# Altium PCB Version1.2.PcbDoc
Units mil, origin at the board's own origin, x right, y up, seen from the top; angles counter-clockwise.
Board outline 1800 x 2100 mil, 2 copper layers (Top Layer, Bottom Layer); 14 components, 19 nets, 44 pads, 0 vias.
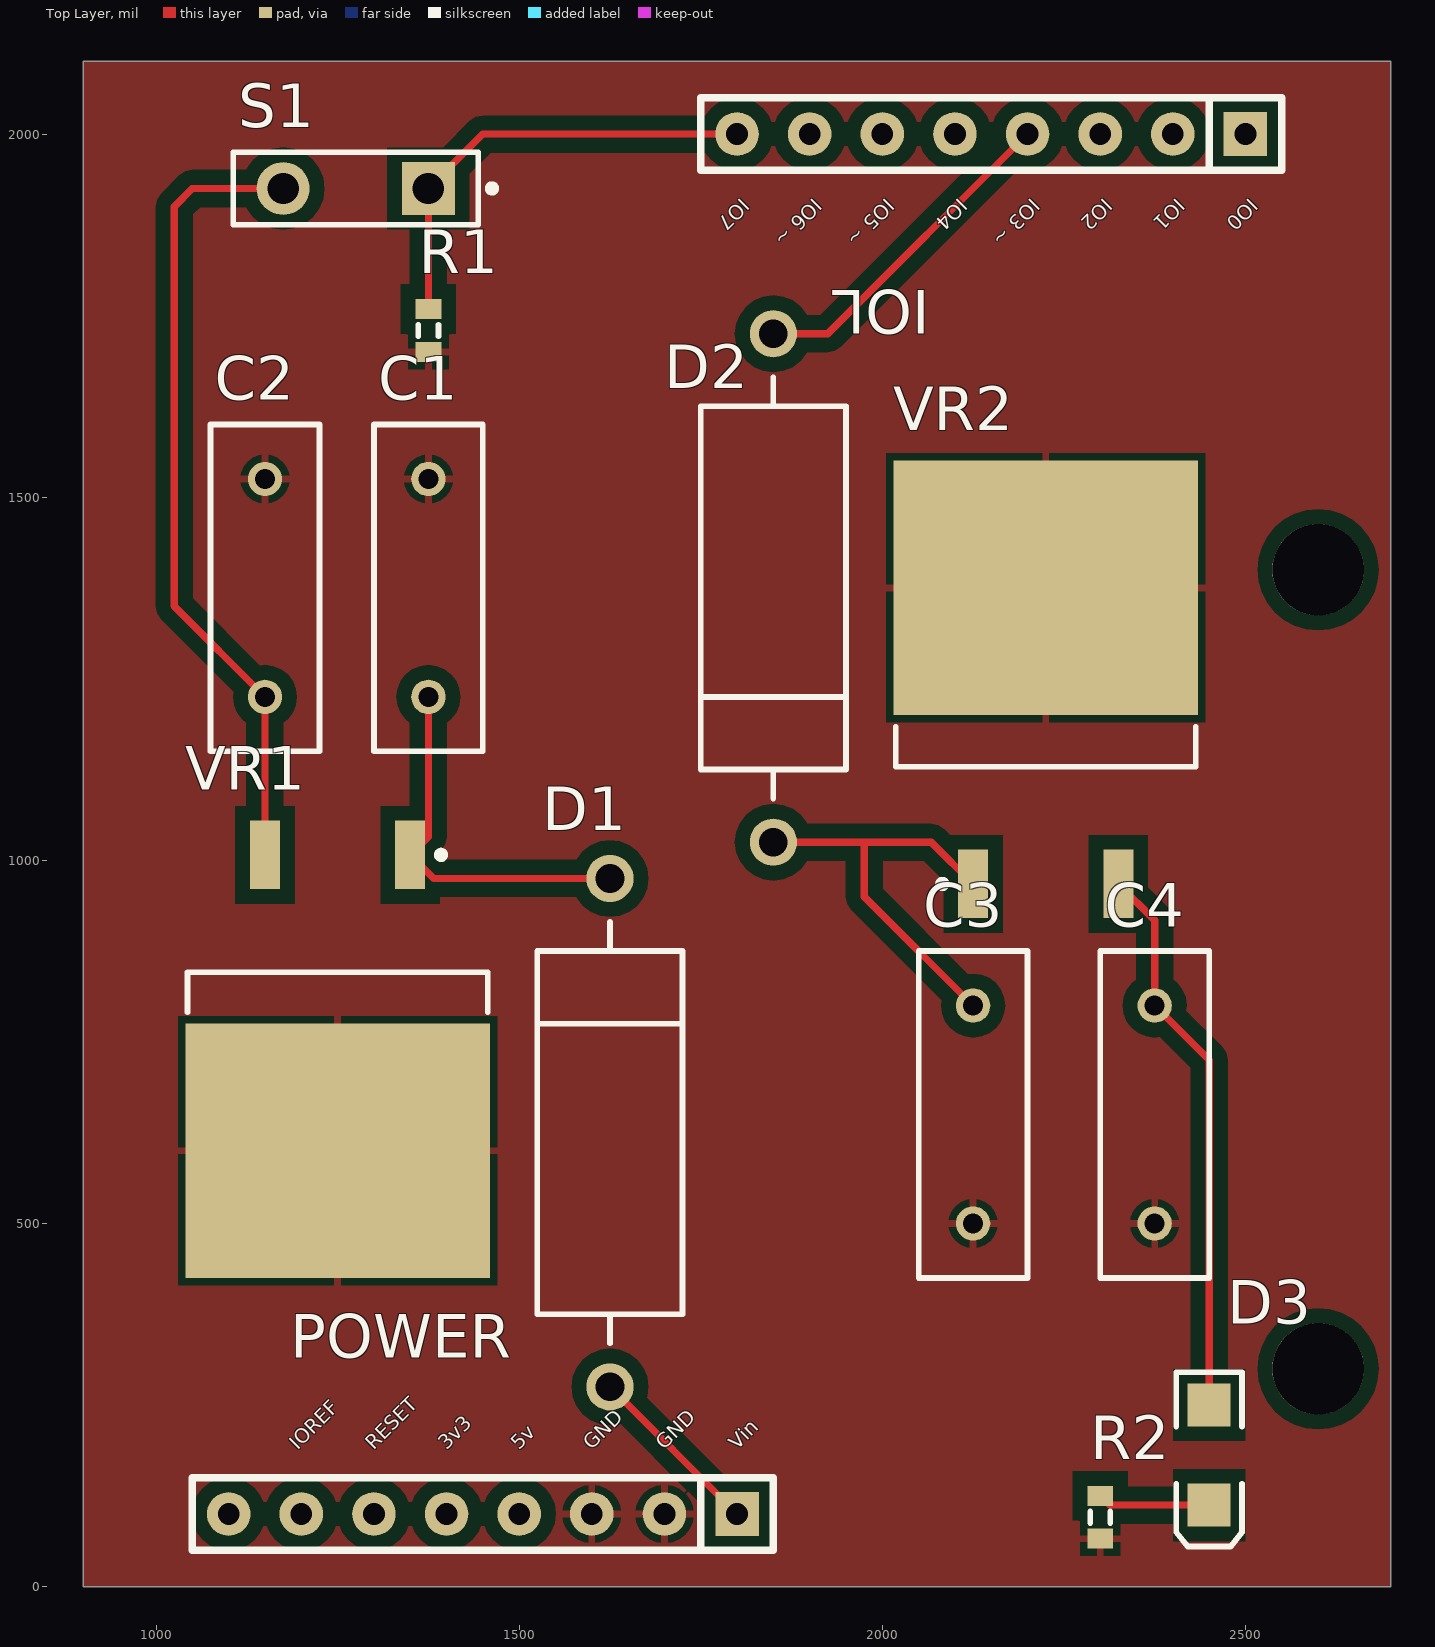
[diagram p0: Top Layer view]
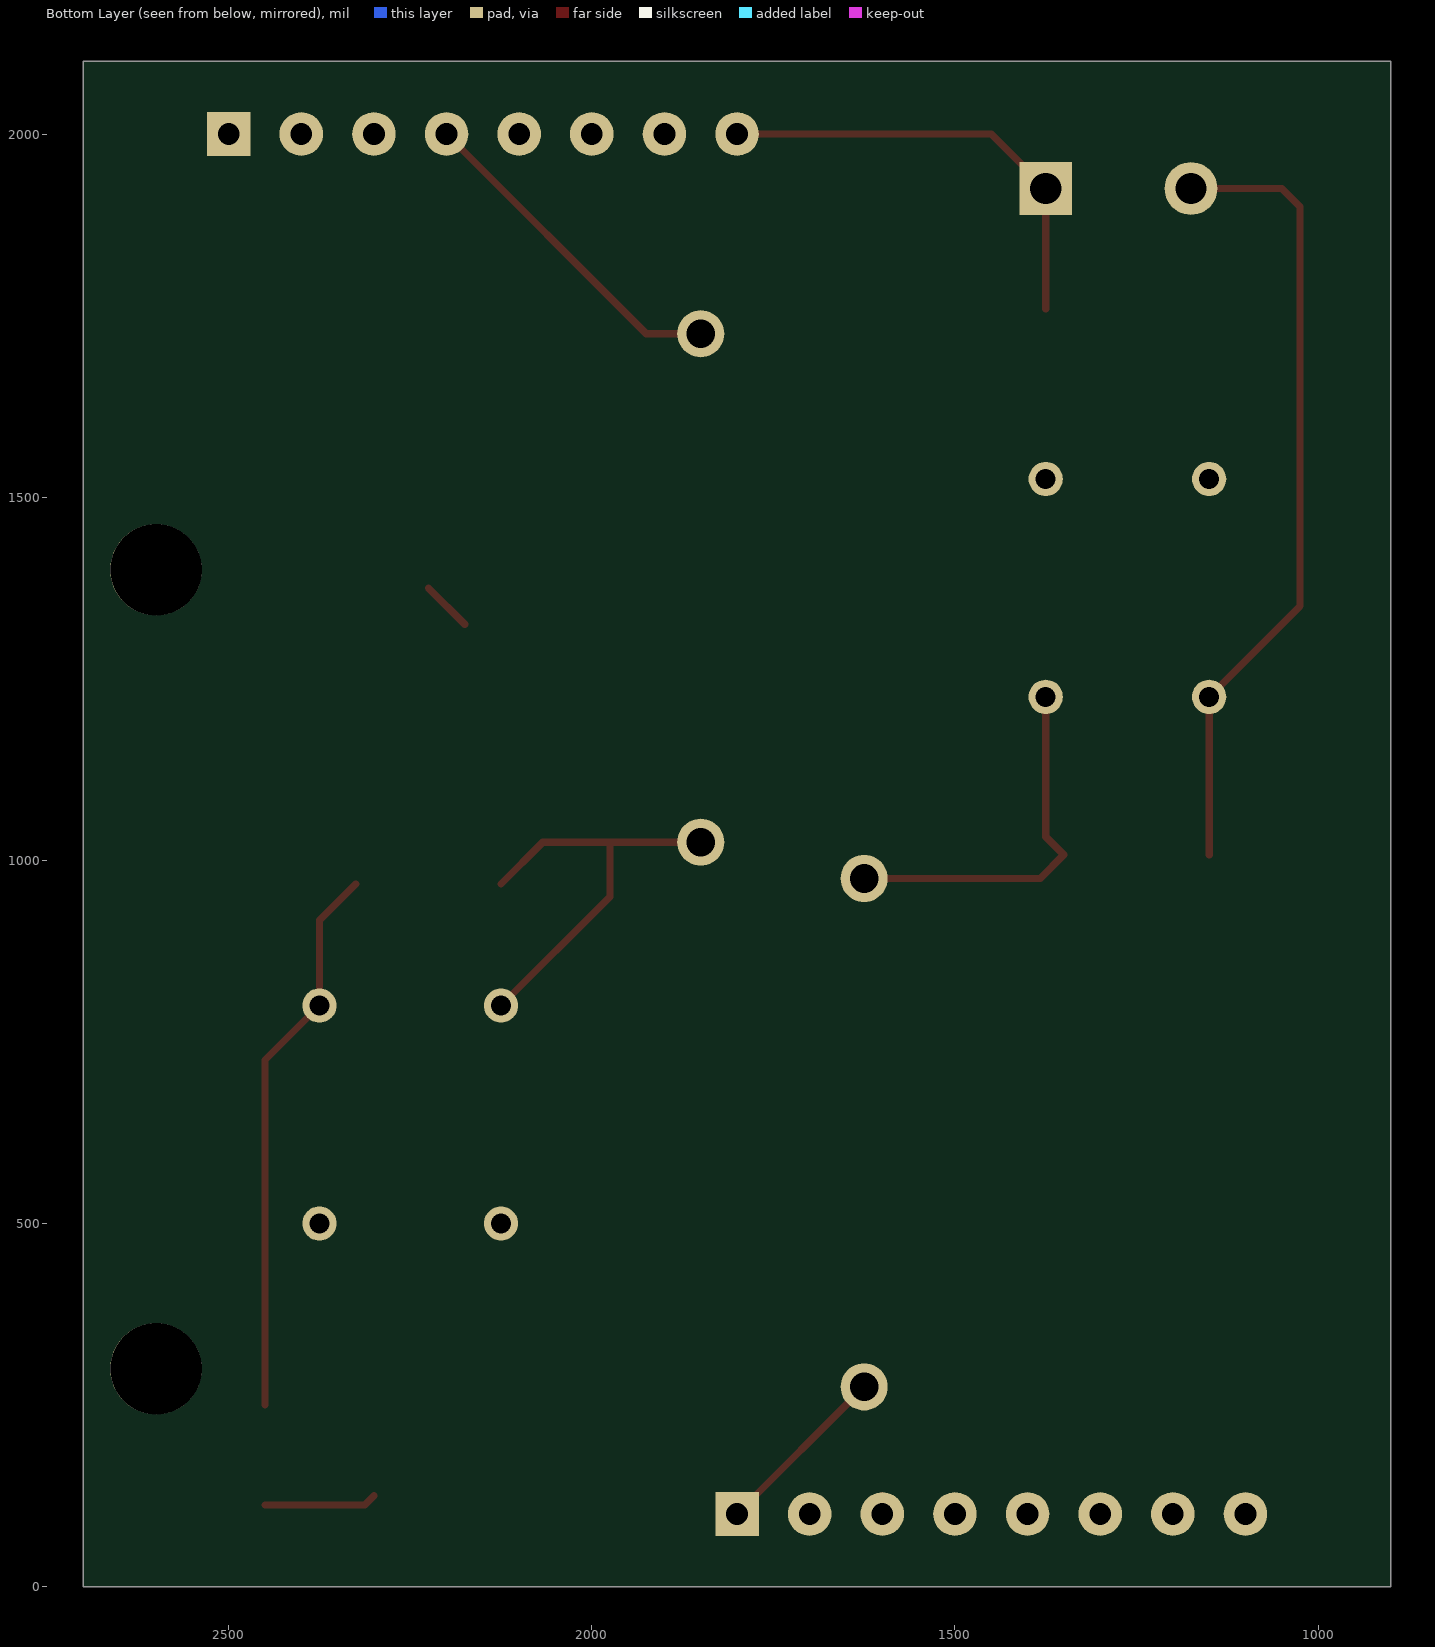
[diagram p1: Bottom Layer view, seen from below]

## Layer stack, top to bottom
Top Solder: solder mask 0.4, Solder Resist, Dk 3.5
Top Layer: signal copper 1.4
Dielectric1: dielectric 12.6, FR-4, Dk 4.8
Bottom Layer: signal copper 1.4
Bottom Solder: solder mask 0.4, Solder Resist, Dk 3.5

## Board outline
900,2100 2700,2100 2700,0 900,0

## Design rules (kind name [scope] priority, off if disabled: settings)
Clearance [All] p1: gap=20 ignorepadtopadclearanceinfootprint=FALSE
PolygonConnect [All] p1: connectstyle=Relief reliefconductorwidth=10 reliefentries=4 polygonreliefangle="90 Angle" airgapwidth=10
RoomDefinition "LED Light Schematic" [InComponentClass('LED Light Schematic')] p1: confinementstyle=ConfineOut formatcopy=TRUE lockcomponents=FALSE outline 2745,-35 3335,-35 3335,430 2745,430
RoutingVias [All] p1: holewidth=28 width=50 viastyle="Through Hole" minholewidth=28 minwidth=50 maxholewidth=28 maxwidth=50
SilkToSolderMaskClearance SilkscreenOverComponentPads [IsPad] p1: minsilkscreentomaskgap=10 clearancetoexposedcopper=TRUE
SolderMaskExpansion [All] p1: expansion=4
Width [All] p1: maxlimit=10 minlimit=10 preferedwidth=10
29 further rules are at their usual default settings.

## Components (designator, comment, footprint, x,y, rotation, side; value= is the part's Value field where it differs from the comment)
C1 "Cap" RAD-0.3 1375,1375 r270 top value=0.1uF
C2 "Cap" RAD-0.3 1150,1375 r270 top value=0.1uF
C3 "Cap" RAD-0.3 2125,650 r90 top value=0.1uF
C4 "Cap" RAD-0.3 2375,650 r90 top value=0.1uF
D1 "5V Zener" DIODE-0.7 1625,625 r90 top
D2 "3.3V Zener" DIODE-0.7 1850,1375 r270 top
D3 "Red LED" 3.2X1.6X1.1 2450,181.1 r270 top
IOL "IOL" "Header 8x1 8.5mm" 2500,2000 r180 top locked
POWER "POWER_UNO" "Header 8x1 8.5mm" 1800,100 r180 top locked
R1 "Res3" J1-0603 1375,1729.53 r90 top value=100k
R2 "Res3" J1-0603 2300,95.47 r90 top value=220
S1 "SW-PB" SPST-2 1275,1925 r180 top
VR1 "5V Reg." D2PAK_N 1250,739.76 r270 top
VR2 "3.3V Reg" D2PAK_N 2225,1235.24 r90 top

## Footprints (in the part's own frame and the unit in brackets; to place one, negate y for a bottom-side part, rotate by r counter-clockwise, add the part's x,y. Pads: shape width x height; smd on the part's side, far side on the other; paste and mask are expansions set on the pad)
3.2X1.6X1.1 [mm] "SMT LED; 2 Flat Leads"
  rect 1.5x1.5 smd: 1(-1.75,0) 2(1.75,0)
  silkscreen extent -2.9,-1.15 3.2,1.15
D2PAK_N [mm] "D2-PAK, 4-Leads, Body 8.8x10.4mm, Pitch 2.54mm, Lead Span 15.1mm, IPC Medium Density"
  rect 2.4x1.05 smd: 1(-6.8,2.54) 3(-6.8,-2.54)
  rect 8.9x10.65 smd: 2(3.55,0)
  silkscreen extent -6.92,-5.25 -1.3,5.25, body extent -2.7,-5.28 6.3,5.28, height 4.69
DIODE-0.7 [mm] "Diode, Thru-Hole; 2 Leads; 0.7 in Pin Spacing"
  round 1.65 hole 1: 1(-8.89,0) 2(8.89,0)
  silkscreen extent -7.37,-2.54 7.37,2.54
"Header 8x1 8.5mm" [mil] "Stackable 8 pin header"
  rect 60x60 hole 30: 1(0,0)
  round 60 hole 30: 2(100,0) 3(200,0) 4(300,0) 5(400,0) 6(500,0) 7(600,0) 8(700,0)
  silkscreen extent -50,-50 750,50, body extent -50,-50 750,50, height 335
J1-0603 [mm] "Chip Resistor, Body 1.6x0.8mm, IPC High Density"
  rect 0.7x0.9 smd: 1(-0.75,0) 2(0.75,0)
  silkscreen extent -0.2,-0.35 0.2,0.35, body extent -0.85,-0.48 0.85,0.48, height 0.9
RAD-0.3 [mm] "Radial Cap, Thru-Hole; 2 Leads; 0.3 in Pin Spacing"
  round 1.2 hole 0.7: 1(-3.81,0) 2(3.81,0)
  silkscreen extent -5.71,-1.91 5.71,1.91
SPST-2 [mm] "Switch; 2 Leads"
  rect 1.85x1.85 hole 1.1: 1(-2.54,0)
  round 1.85 hole 1.1: 2(2.54,0)
  silkscreen extent -4.89,-1.27 4.28,1.27

## Part data
C1 C2 C3 C4: "Capacitor", LatestRevisionDate=17-Jul-2002, LatestRevisionNote="Re-released for DXP Platform.", PackageDescription="Radial Cap, Thru-Hole; 2 Leads; 0.3 in Pin Spacing", PackageReference=RAD-0.3, Published=8-Jun-2000, Publisher="Altium Limited"
D1 D2: library part "D Zener", "Zener Diode", LatestRevisionDate=17-Jul-2002, LatestRevisionNote="Re-released for DXP Platform.", PackageDescription="Diode, Thru-Hole; 2 Leads; 0.7 in Pin Spacing", PackageReference=DIODE-0.7, Published=8-Jun-2000, Publisher="Altium Limited"
D3: library part LED2, "Typical RED, GREEN, YELLOW, AMBER GaAs LED", LatestRevisionDate=17-Jul-2002, LatestRevisionNote="Re-released for DXP Platform.", PackageDescription="SM LED; 2 Flat Leads", PackageReference=3.2X1.6X1.1, PackageVersion=Feb-2002, Published=8-Jun-2000, Publisher="Altium Limited"
IOL POWER: Supplier Part Number 1=SAM1198-08-ND, Supplier 1=Digi-Key, Supplier 2=Arrow, Supplier 3=Arrow, Supplier 4=Arrow, Supplier Part Number 2=2698939, Supplier Part Number 3=2698940, Supplier Part Number 4=2698925
R1 R2: "Resistor", LatestRevisionDate=29-May-2009, LatestRevisionNote="IPC-7351 Footprint Added.", PackageDescription="Chip Resistor", PackageReference=J1-0603, Published=8-Jun-2000, Publisher="Altium Limited"
S1: "Switch", LatestRevisionDate=17-Jul-2002, LatestRevisionNote="Re-released for DXP Platform.", PackageDescription="Switch; 2 Leads", PackageReference=SPST-2, Published=24-Mar-1999, Publisher="Altium Limited"
VR1 VR2: library part "Volt Reg", "Voltage Regulator", LatestRevisionDate=29-May-2009, LatestRevisionNote="IPC-7351 Footprint Added.", PackageDescription="3-Pin Transistor Outline Package 2.54 mm Pitch, 15.1 mm Lead Span", PackageReference=D2PAK, Published=24-Mar-1999, Publisher="Altium Limited"

## Free pads (board coordinates)
  round 125.98 hole 125.98: 0(2600,300) 0(2600,1400)

## Nets (pads, with @x,y where several pads share a name; then routed paths per layer and width w, separated by ;. In a path a pad name is that pad's centre, name@x,y a point inside that pad or via, vN(x,y) a via of type N, cw(c..) or ccw(c..) an arc to the next point about the centre after c; other vN are vias at no path point)
3V3: POWER.5
5V: POWER.4
GND: C1.1 C2.1 C3.1 C4.1 POWER.2 POWER.3 R1.1 R2.1 VR1.2 VR2.2 | length 95.7
  Top Layer w10: POWER.3 POWER.3@1600,125 ; VR2.2@2175,1325 VR2.2
IO0: IOL.1
IO1: IOL.2
IO2: IOL.3
IO3: D2.1 IOL.4 | length 463.9
  Top Layer w10: D2.1 1925,1725 IOL.4
IO4: IOL.5
IO5: IOL.6
IO6: IOL.7
IO7: IOL.8 R1.2 S1.1 | length 622
  Top Layer w10: R1.2 S1.1 1450,2000 IOL.8
IOREF: POWER.7
NetC1_2: C1.2 D1.2 VR1.1 | length 516.3
  Top Layer w10: C1.2 1375,1032.48 VR1.1 1382.48,975 D1.2
NetC2_2: C2.2 S1.2 VR1.3 | length 1104.7
  Top Layer w10: VR1.3 C2.2 1025,1350 1025,1900 1050,1925 S1.2
NetC3_2: C3.2 D2.2 VR2.1 | length 585.9
  Top Layer w10: D2.2 1975,1025 ; C3.2 1975,950 1975,1025 ; VR2.1 2067.52,1025 1975,1025
NetC4_2: C4.2 D3.1 VR2.3 | length 769.3
  Top Layer w10: VR2.3 2375,917.52 C4.2 2450,725 D3.1
NetD3_2: D3.2 R2.2 | length 155.3
  Top Layer w10: R2.2 2312.8,112.2 D3.2
RESET: POWER.6
VIN: D1.1 POWER.1 | length 247.5
  Top Layer w10: D1.1 POWER.1
pads on no net: POWER.8

## Polygon pours and split planes (outlines as drawn)
GND on Top Layer "GND" (solid, pour order 7): 900,2100 2700,2100 2700,0 900,0

## Silkscreen, mask and mechanical layers (free items; w line width, h text height)
Top Overlay:
  text "IO7" at 1805,1912.93 h20 r225
  text "IO6 ~" at 1905,1912.93 h20 r225
  text "IO5 ~" at 2005,1912.93 h20 r225
  text "IO4" at 2105,1912.93 h20 r225
  text "IO3 ~" at 2205,1912.93 h20 r225
  text "IO2" at 2305,1912.93 h20 r225
  text "IO1" at 2405,1912.93 h20 r225
  text "IO0" at 2505,1912.93 h20 r225
  text "IOREF" at 1195,187.07 h20 r45
  text "RESET" at 1300,187.07 h20 r45
  text "3v3" at 1400,187.07 h20 r45
  text "5v" at 1500,187.07 h20 r45
  text "GND" at 1600,187.07 h20 r45
  text "GND" at 1700,187.07 h20 r45
  text "Vin" at 1800,187.07 h20 r45
  text "RESET" at 1295,-2515 h20 r45
  text "3v3" at 1395,-2515 h20 r45
  text "5v" at 1495,-2515 h20 r45
  text "GND" at 1595,-2515 h20 r45
  text "GND" at 1695,-2515 h20 r45
  text "Vin" at 1795,-2515 h20 r45
Mechanical 1:
  circle w5: c2600,300 r62.99
  circle w5: c2600,1400 r62.99
  lines w5: 900,0 2600,0 2600,50 2700,150 2700,1500 2600,1600 2600,2000 2500,2100 925,2100 900,2075 900,0